# EAGLE board 3906 (EAGLE 5.10)
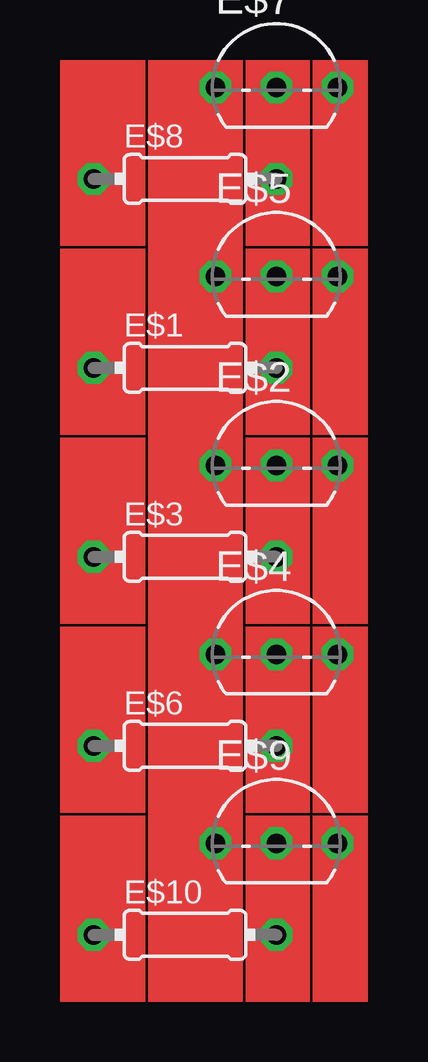
[diagram p0: board, top side]

No outline drawn. Coordinates in mm, seen from the top.
Copper layers (1*16): Top 0.035mm / dielectric 1.5mm / Bottom 0.035mm
Design rules "default": minimum track width 10mil, minimum drill 24mil, track to track 8mil, track to pad 8mil, pad to pad 8mil, via to via 8mil, smd to smd 8mil, copper to edge 40mil, drill to drill 8mil, minimum pad ring 10mil, minimum via ring 8mil, stop-mask expansion 4mil, vias tented up to drill 0mil, thermal gap 10mil

## Footprints (pad centres in the part's own frame; a part is rotated, then mirrored left to right if it is on the bottom)
0204/7 = drill 0.813 octagon: 1 -3.81,0; 2 3.81,0
TO92- = drill 0.813 octagon: 1 -2.54,0; 2 0,0; 3 2.54,0

## Placement (x,y rotation side)
E$1  [0204/7]  5.21,26.42 0 top
E$2  [TO92-]  9.02,22.35 0 top
E$3  [0204/7]  5.21,18.54 0 top
E$4  [TO92-]  9.02,14.48 0 top
E$5  [TO92-]  9.02,30.23 0 top
E$6  [0204/7]  5.21,10.67 0 top
E$7  [TO92-]  9.02,38.1 0 top
E$8  [0204/7]  5.21,34.29 0 top
E$9  [TO92-]  9.02,6.6 0 top
E$10  [0204/7]  5.21,2.79 0 top

## Library data of the parts
E$1 E$3 E$6 E$8 E$10 = rcl
E$2 E$4 E$5 E$7 E$9 = maxim

## Nets
S$1: E$1.2 E$5.2
S$2: E$2.2 E$3.2
S$3: E$4.2 E$6.2
S$4: E$7.2 E$8.2
S$5: E$9.2 E$10.2

## Tracks (layer width: path | path; a pad name or v marks a point on that pad's centre or on a via)
S$1
  Top 0.406: E$1.2 E$5.2
S$2
  Top 0.406: E$3.2 E$2.2
S$3
  Top 0.406: E$6.2 E$4.2
S$4
  Top 0.406: E$8.2 E$7.2
S$5
  Top 0.406: E$10.2 E$9.2
(copper drawn outside any net)
  shapes: Top area x27